# EAGLE board QTTPCB01V01_v3 (EAGLE 9.7.0)
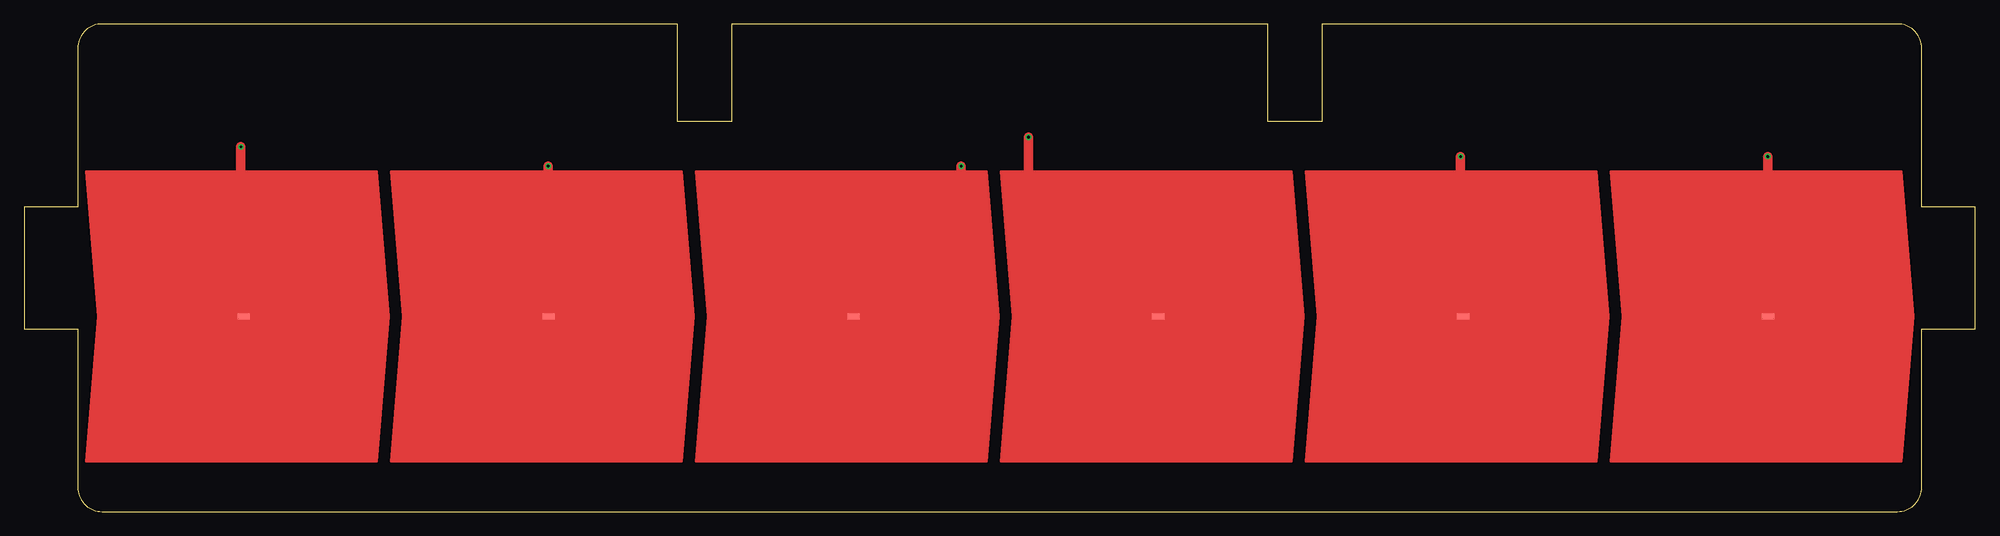
[diagram p0: board, top side]
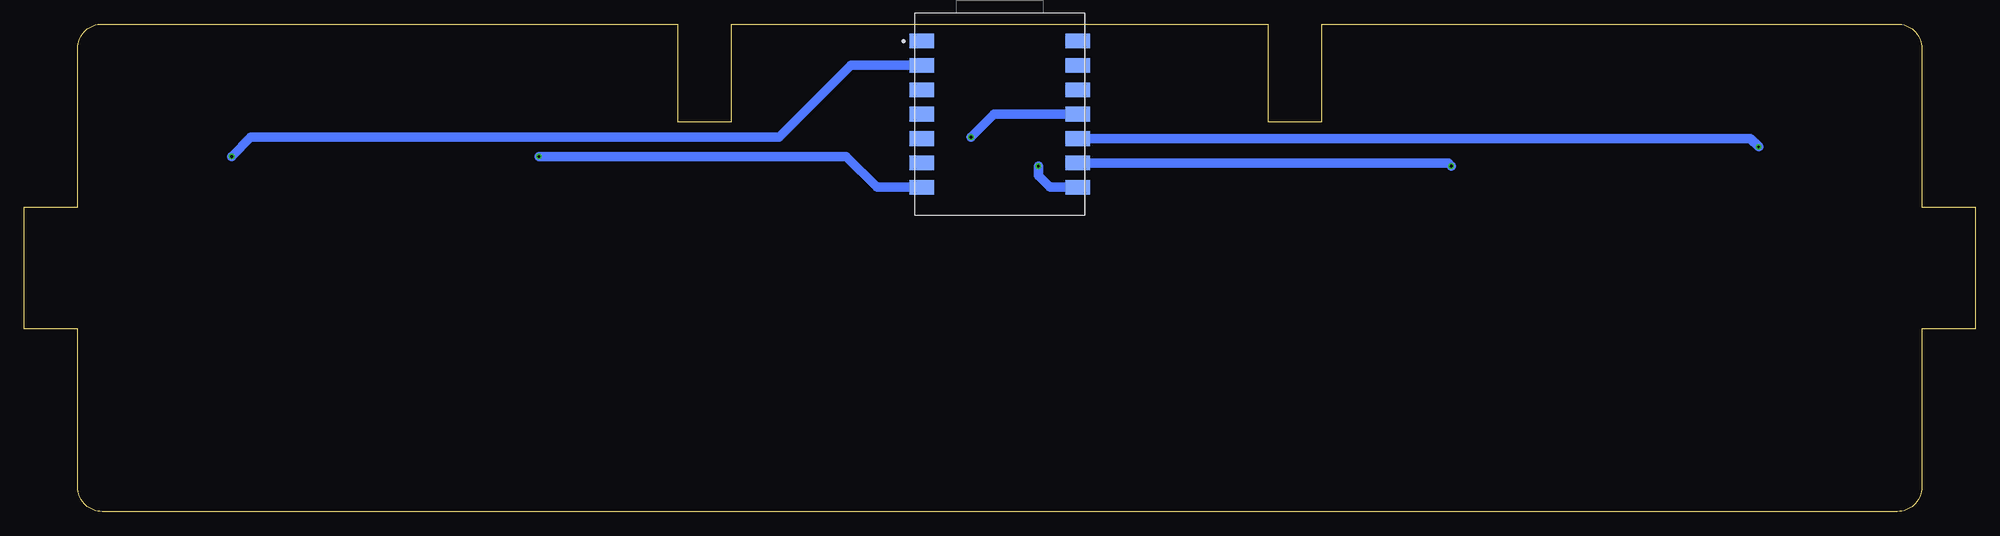
[diagram p1: board, bottom side, seen from below]

Size 203.2 x 50.8 mm. Coordinates in mm from the lower left corner, seen from the top.
Outline: 0,31.75 0,19.05 5.59,19.05 5.59,2.54 arc90 8.13,0 195.07,0 arc90 197.61,2.54 197.61,19.05 203.2,19.05 203.2,31.75 197.61,31.75 197.61,48.26 arc90 195.07,50.8 135.13,50.8 135.13,40.64 129.54,40.64 129.54,50.8 73.66,50.8 73.66,40.64 68.07,40.64 68.07,50.8 8.13,50.8 arc90 5.59,48.26 5.59,31.75 0,31.75
Copper layers (1*16): Top 0.035mm / dielectric 1.5mm / Bottom 0.035mm
Design rules "DRC_2L": minimum track width 0.15mm, minimum drill 0.3mm, track to track 0.15mm, track to pad 0.15mm, pad to pad 0.15mm, via to via 0.15mm, smd to smd 0.15mm, copper to edge 0.4mm, drill to drill 0.15mm, minimum pad ring 0.15mm, minimum via ring 0.15mm, stop-mask expansion 0.1mm, vias tented up to drill 0.33mm, thermal gap 0.25mm

## Footprints (pad centres in the part's own frame; a part is rotated, then mirrored left to right if it is on the bottom)
MODULE_SAMD21_SMD = smd 2.54 x 1.524: 1 -8.128,7.62; 2 -8.128,5.08; 3 -8.128,2.54; 4 -8.128,0; 5 -8.128,-2.54; 6 -8.128,-5.08; 7 -8.128,-7.62; 8 8.128,-7.62; 9 8.128,-5.08; 10 8.128,-2.54; 11 8.128,0; 12 8.128,2.54; 13 8.128,5.08; 14 8.128,7.62
TOUCHPADX6A = smd 1.27 x 0.635: 1 -78.74,0; 2 -46.99,0; 3 -15.24,0; 4 16.51,0; 5 48.26,0; 6 80.01,0

## Placement (x,y rotation side)
U1  SEEED_XIAO_SAMD21SMD  [MODULE_SAMD21_SMD]  101.6,41.4 0 bottom
U$1  TOUCHPADX6T_PAD2  [TOUCHPADX6A]  101.6,20.32 0 top

## Library data of the parts
U1 U$1 = PENNEDS

## Nets
3V3: U1.12
5V: U1.14
GND: U1.13
N$1: U1.1
QT1: U1.10 U$1.1
QT2: U1.9 U$1.2
QT3: U1.8 U$1.3
QT4: U1.11 U$1.4
QT5: U1.7 U$1.5
QT6: U1.2 U$1.6

## Tracks (layer width: path | path; a pad name or v marks a point on that pad's centre or on a via)
QT1  (via drill 0.3 pad 0.6)
  Top 1: v22.59,38 22.59,20.59 U$1.1
  Bottom 1: U1.10 23.45,38.86 v22.59,38
QT2  (via drill 0.3 pad 0.6)
  Top 1: v54.59,36 54.59,22 54.59,21 54.59,20.34 U$1.2
  Bottom 1: U1.9 54.91,36.32 v54.59,36
QT3  (via drill 0.3 pad 0.6)
  Top 1: v97.59,36 97.59,29 86.59,18 86.36,18.23 U$1.3
  Bottom 1: U1.8 96.37,33.78 97.59,35 v97.59,36
QT4  (via drill 0.3 pad 0.6)
  Top 1: v104.59,39 104.59,34 104.59,33.84 | 104.59,33.84 104.59,32 | U$1.4 104.59,33.84
  Bottom 1: U1.11 102.19,41.4 v104.59,39
QT5  (via drill 0.3 pad 0.6)
  Top 1: v149.59,37 149.59,20.59 U$1.5
  Bottom 1: U1.7 114.37,33.78 117.59,37 v149.59,37
QT6  (via drill 0.3 pad 0.6)
  Top 1: U$1.6 181.59,20.34 v181.59,37
  Bottom 1: U1.2 117.11,46.48 124.59,39 179.59,39 v181.59,37